# EAGLE board ADUM1250ARZ v.01 (EAGLE 6.4)
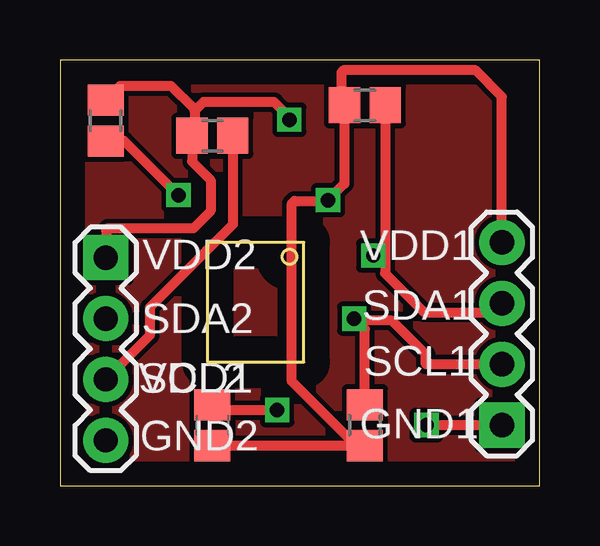
[diagram p0: board, top side]
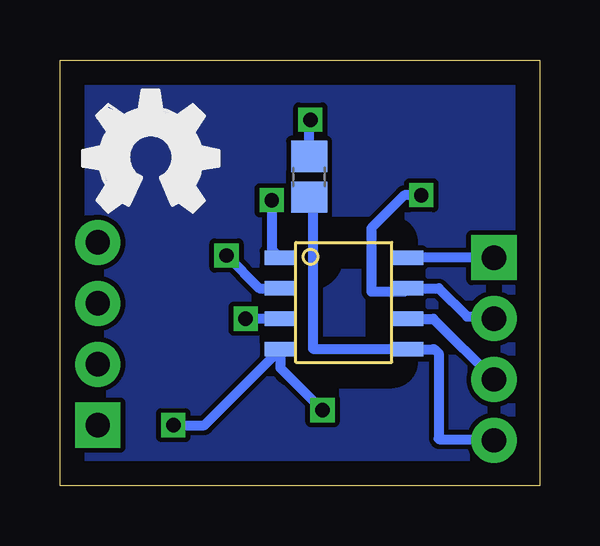
[diagram p1: board, bottom side, seen from below]

Size 19.99 x 17.77 mm. Coordinates in mm from the lower left corner, seen from the top.
Outline: 0,0 19.99,0 19.99,17.77 0,17.77 0,0
Copper layers (1*16): Top 0.035mm / dielectric 1.5mm / Bottom 0.035mm
Design rules "default": minimum track width 10mil, minimum drill 24mil, track to track 8mil, track to pad 8mil, pad to pad 8mil, via to via 8mil, smd to smd 8mil, copper to edge 40mil, drill to drill 8mil, minimum pad ring 10mil, minimum via ring 8mil, stop-mask expansion 4mil, vias tented up to drill 0mil, thermal gap 10mil

## Footprints (pad centres in the part's own frame; a part is rotated, then mirrored left to right if it is on the bottom)
C0805 = smd 1.3 x 1.5: 1 -0.85,0; 2 0.85,0
1X04 = drill 1.016 pad 1.88 square: 1 0,0 | drill 1.016 pad 1.88: 2 2.54,0; 3 5.08,0; 4 7.62,0
R0805 = smd 1.3 x 1.5: 1 -0.85,0; 2 0.85,0
ADUM1250ARZ = smd 1.3 x 0.61: GND1 -0.65,-4.455; GND2 4.65,-4.455; SCL1 -0.65,-3.185; SCL2 4.65,-3.185; SDA1 -0.65,-1.915; SDA2 4.65,-1.915; VDD1 -0.65,-0.645; VDD2 4.65,-0.645

## Placement (x,y rotation side)
C1  .1uF  [C0805]  6.35,2.54 90 top
C2  .1uF  [C0805]  9.61,12.9 270 bottom
JP1  [1X04]  18.41,2.54 90 top
JP2  [1X04]  1.91,9.53 270 top
R1  4.7k  [R0805]  12.7,2.54 270 top
R2  4.7k  [R0805]  12.7,15.88 180 top
R3  4.7k  [R0805]  6.35,14.61 180 top
R4  4.7k  [R0805]  1.91,15.24 90 top
U$1  ADUM1250ARZ  [ADUM1250ARZ]  10.16,10.16 0 bottom
U$2  [OSHW_FILLX200_NOTEXT]  19.05,11.43 0 bottom

## Library data of the parts
C1 C2 R1-R4 = resistor
JP1 JP2 = SparkFun
U$1 = Random parts
U$2 = ohw-logo

## Nets
GND1: C1.2 JP1.1 U$1.GND1
GND2: C2.2 JP2.4 U$1.GND2
SCL1: JP1.2 R1.1 U$1.SCL1
SCL2: JP2.3 R3.1 U$1.SCL2
SDA1: JP1.3 R2.1 U$1.SDA1
SDA2: JP2.2 R4.1 U$1.SDA2
VDD1: C1.1 JP1.4 R1.2 R2.2 U$1.VDD1
VDD2: C2.1 JP2.1 R3.2 R4.2 U$1.VDD2

## Tracks (layer width: path | path; a pad name or v marks a point on that pad's centre or on a via)
GND
  pour Bottom: 0,17.78 0,0 20.32,0 20.32,17.78
  pour Top: 20.32,0 0,0 0,17.78 20.32,17.78
GND1  (via drill 0.6)
  Top 0.406: v9.05,3.17 6.57,3.17 C1.2 | JP1.1 v15.27,2.54
  Bottom 0.406: v9.05,3.17 10.81,4.93 U$1.GND1 13.97,2.54 v15.27,2.54
GND2
  Bottom 0.406: JP2.4 1.95,1.95 4.19,1.95 4.22,1.98 4.22,5.53 4.4,5.71 4.45,5.71 4.46,5.71 U$1.GND2 9.41,5.71 9.44,5.73 9.44,12.15 9.61,12.32 | C2.2 9.61,12.32 | 9.61,12.32 9.74,12.45
SCL1  (via drill 0.6)
  Top 0.406: R1.1 12.7,6.53 v12.25,6.98 12.33,6.9 13.83,6.9 15.24,5.49 15.24,5.08 JP1.2
  Bottom 0.406: v12.25,6.98 U$1.SCL1
SCL2
  Top 0.406: R3.1 7.2,10.91 6.11,9.83 3.74,7.45 3.74,6.28 JP2.3
  Bottom 0.406: U$1.SCL2 4.44,6.97 JP2.3
SDA1  (via drill 0.6)
  Top 0.406: R2.1 13.55,10.11 | 13.55,10.11 v13.05,9.61 | 13.55,10.11 13.55,8.87 15.18,7.24 18.03,7.24 JP1.3
  Bottom 0.406: v13.05,9.61 | v13.05,9.61 11.69,8.25 U$1.SDA1
SDA2  (via drill 0.6)
  Top 0.406: R4.1 2.67,14.39 v4.94,12.13
  Bottom 0.406: v4.94,12.13 5.64,12.13 7.01,10.76 7.01,8.11 5.65,8.11 U$1.SDA2 4.2,8.24 3.03,7.07 1.99,7.07 JP2.2
VDD1  (via drill 0.6)
  Top 0.406: C1.1 R1.2 12.32,1.69 9.66,4.36 9.66,11.78 9.77,11.89 11.14,11.89 v11.17,11.92 11.85,12.61 R2.2 11.72,16 11.72,17.26 11.81,17.34 17.31,17.34 18.41,16.23 JP1.4
  Bottom 0.406: v11.17,11.92 11.17,9.87 U$1.VDD1
VDD2  (via drill 0.6)
  Top 0.406: v9.56,15.28 9.56,15.38 8.92,16.02 5.97,16.02 5.61,15.65 | 5.61,15.65 5.61,14.71 R3.2 5.5,13.54 6.28,12.76 6.28,11.47 5.55,10.75 2.01,10.75 1.93,10.66 1.93,9.55 JP2.1 | 5.61,15.65 5.61,15.71 4.63,16.68 2.5,16.68 R4.2
  Bottom 0.406: C2.1 9.61,15.23 v9.56,15.28 | JP2.1 U$1.VDD2

## Text on the board
tNames: VDD2 | VDD1 | SDA1 | SDA2 | SCL1 | SCL2 | VDD1 | GND1 | GND2